# Altium PCB INNOVMED.PcbDoc
Units mm, origin at the board's own origin, x right, y up, seen from the top; angles counter-clockwise.
Board outline 37.59 x 63.88 mm, 2 copper layers (Top Layer, Bottom Layer); 25 components, 27 nets, 106 pads, 15 vias.
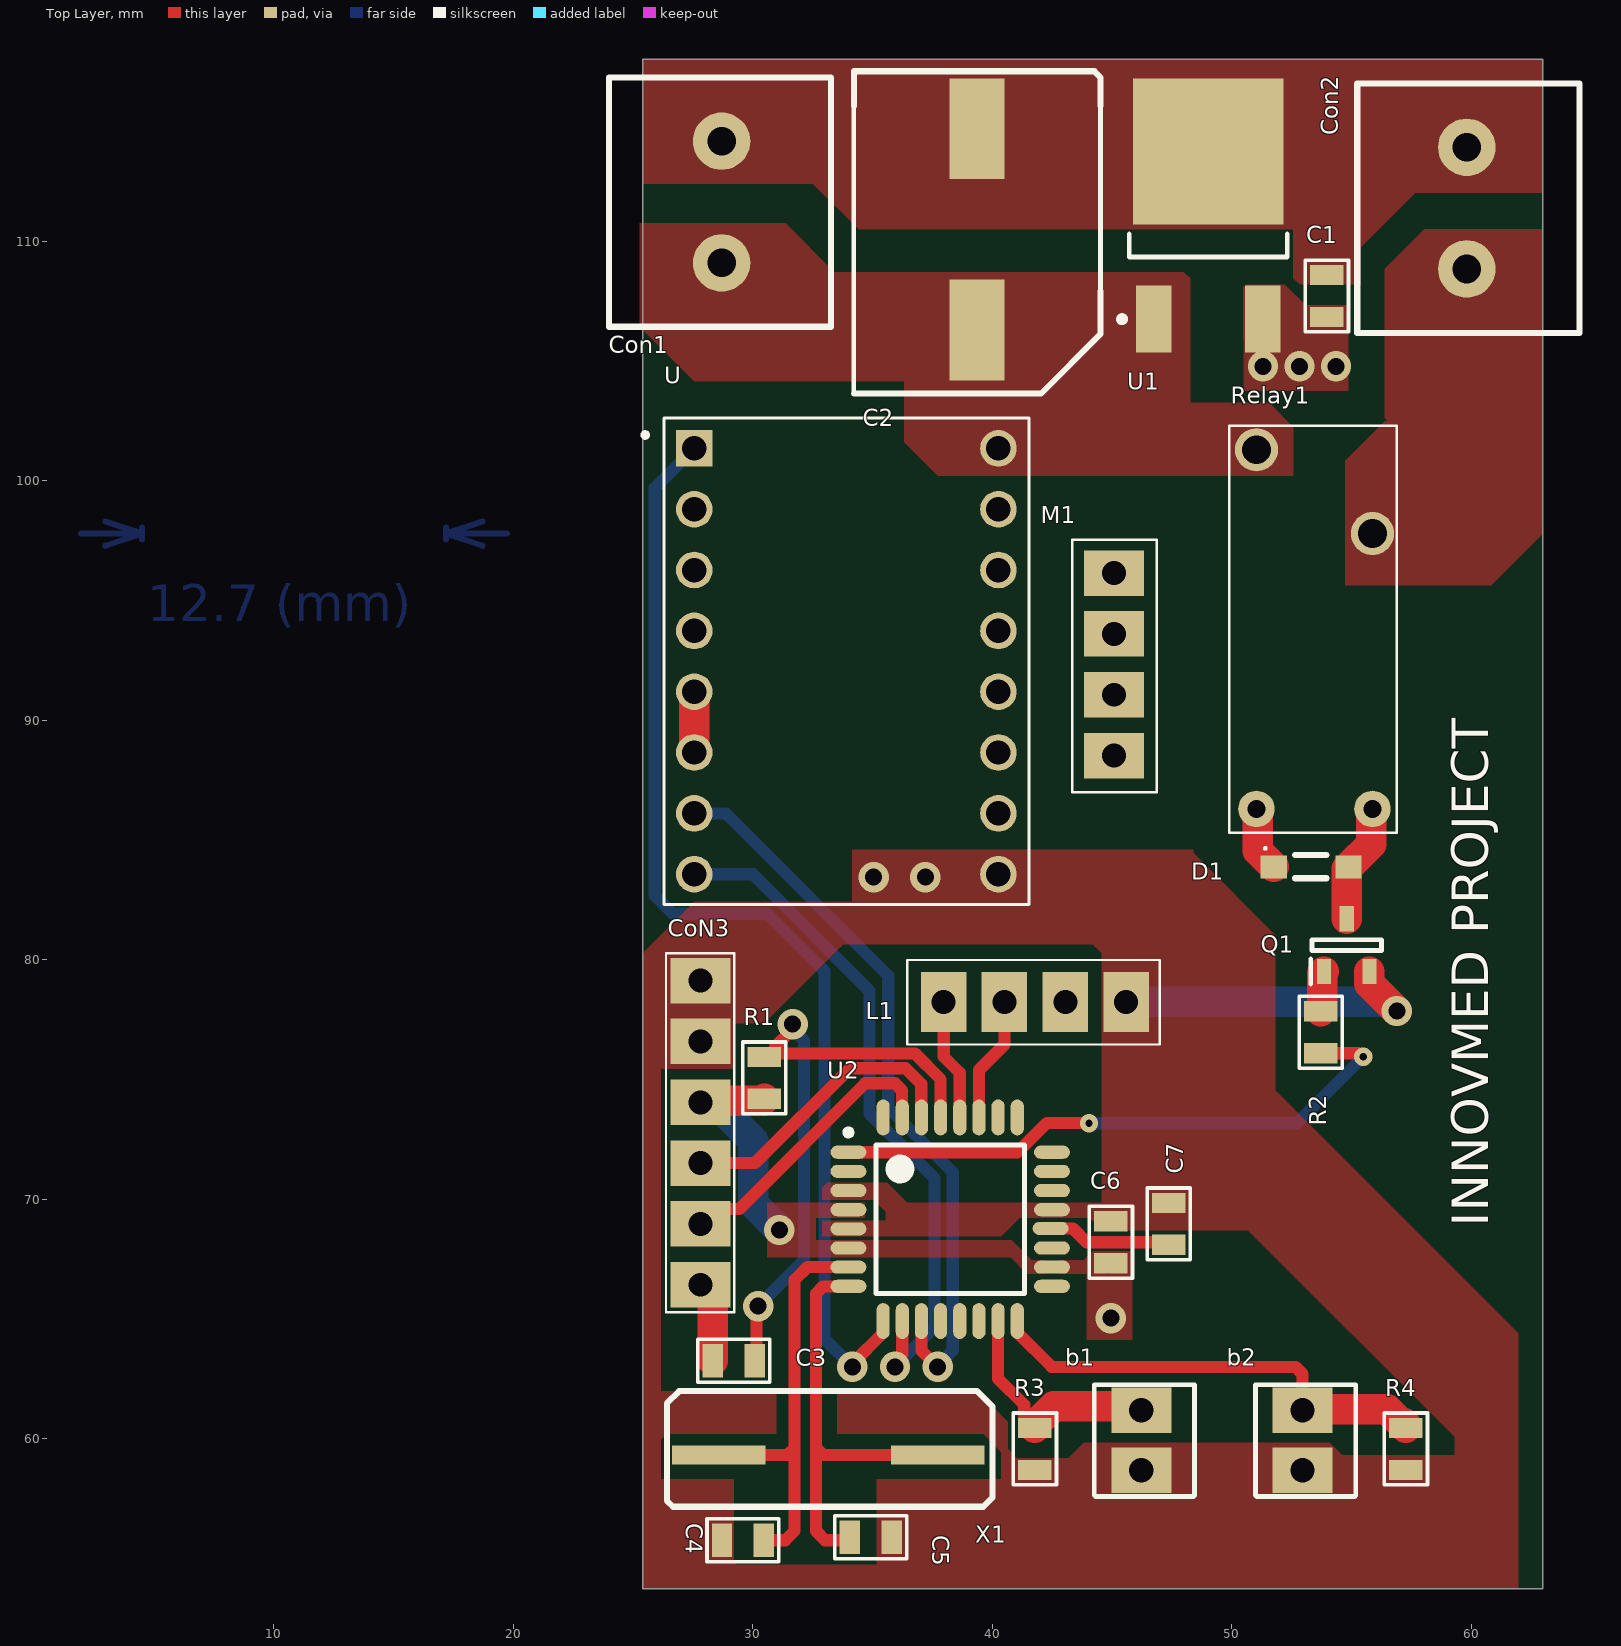
[diagram p0: Top Layer view]
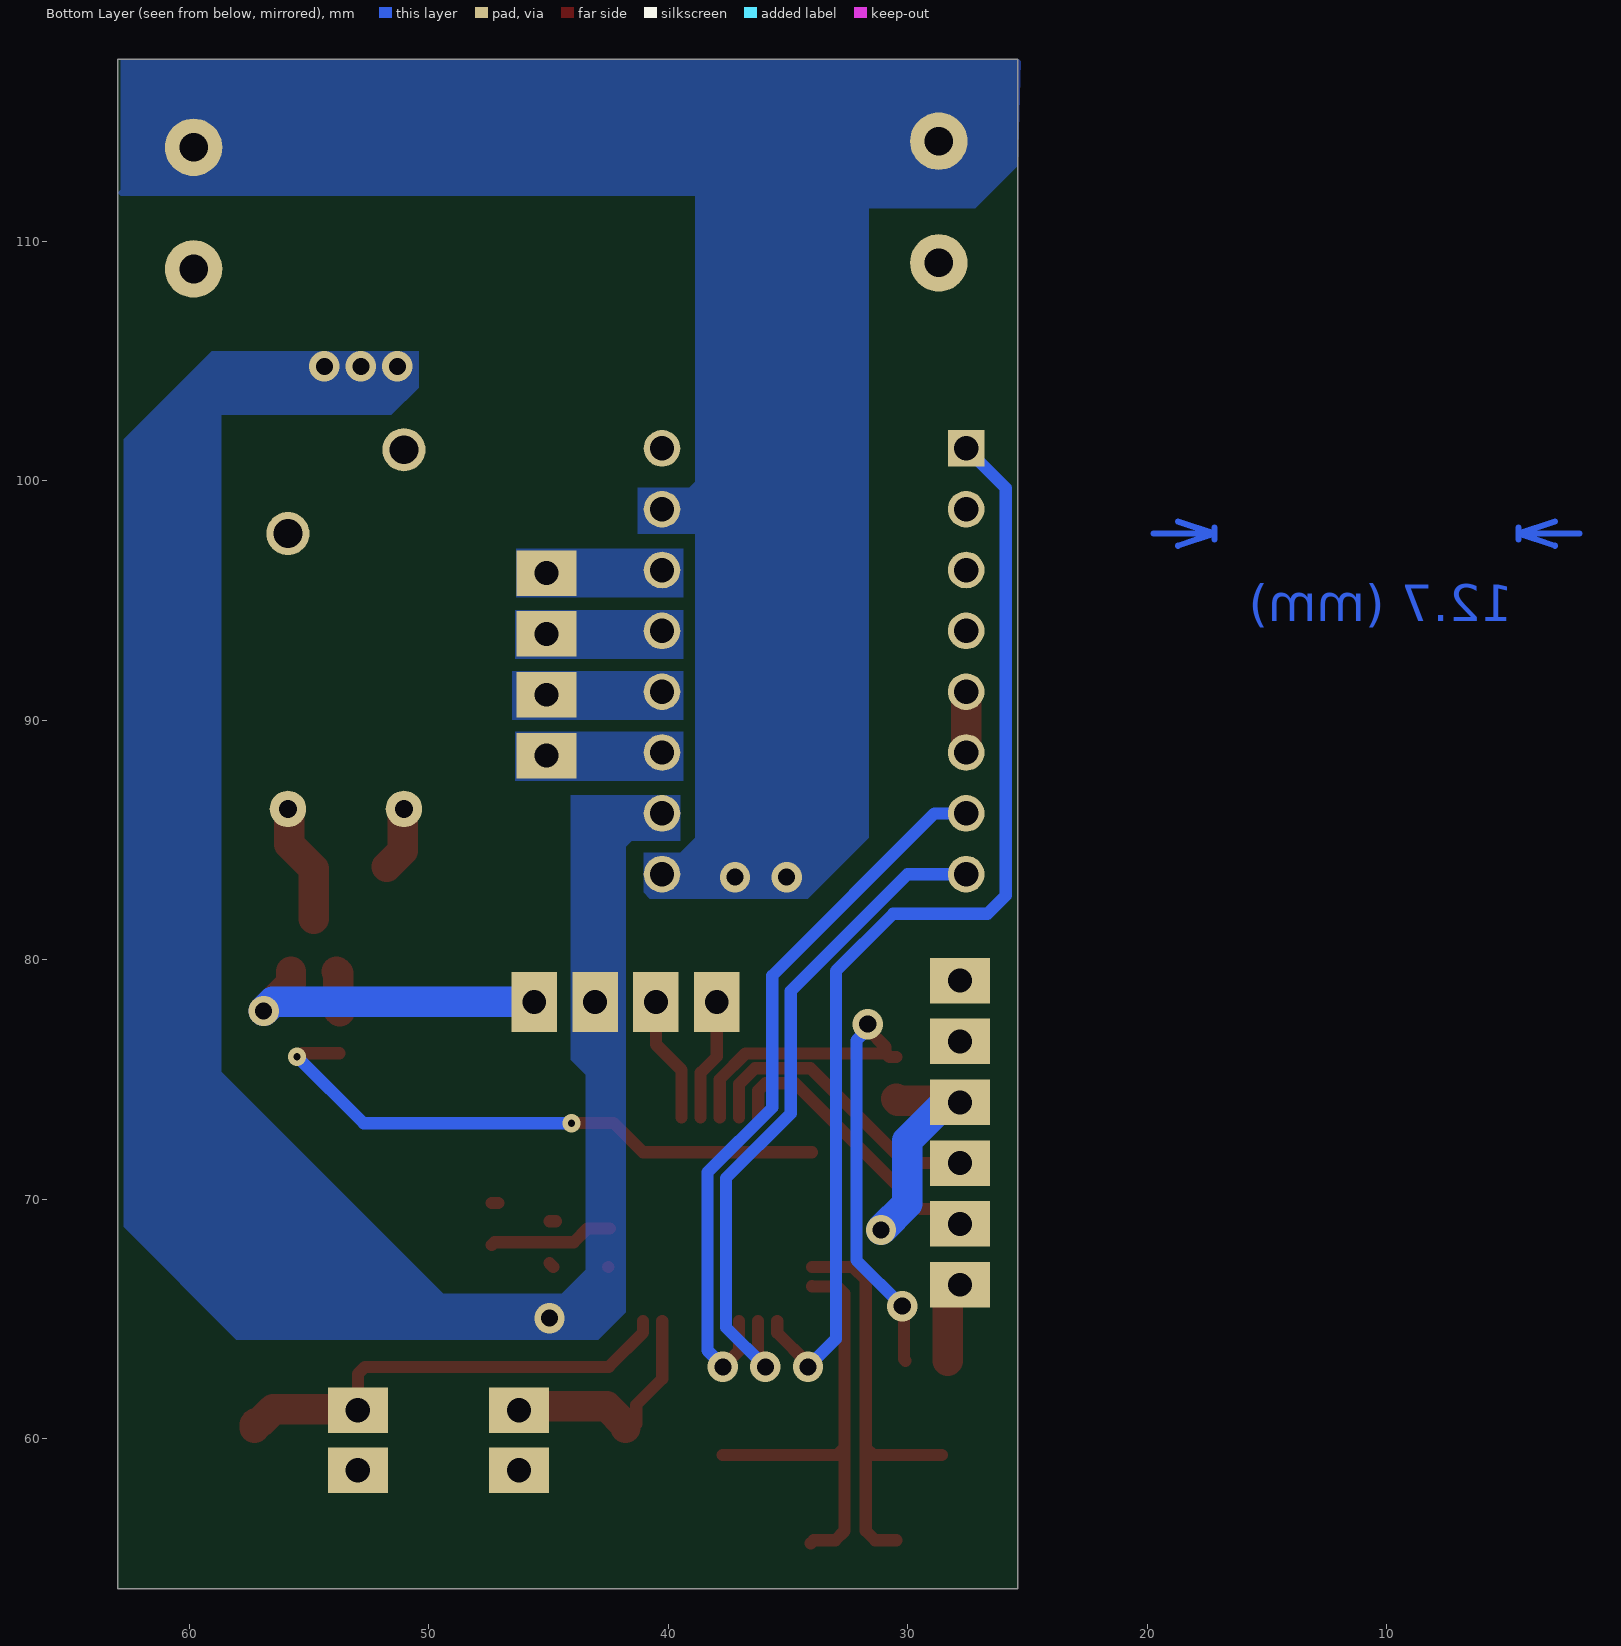
[diagram p1: Bottom Layer view, seen from below]
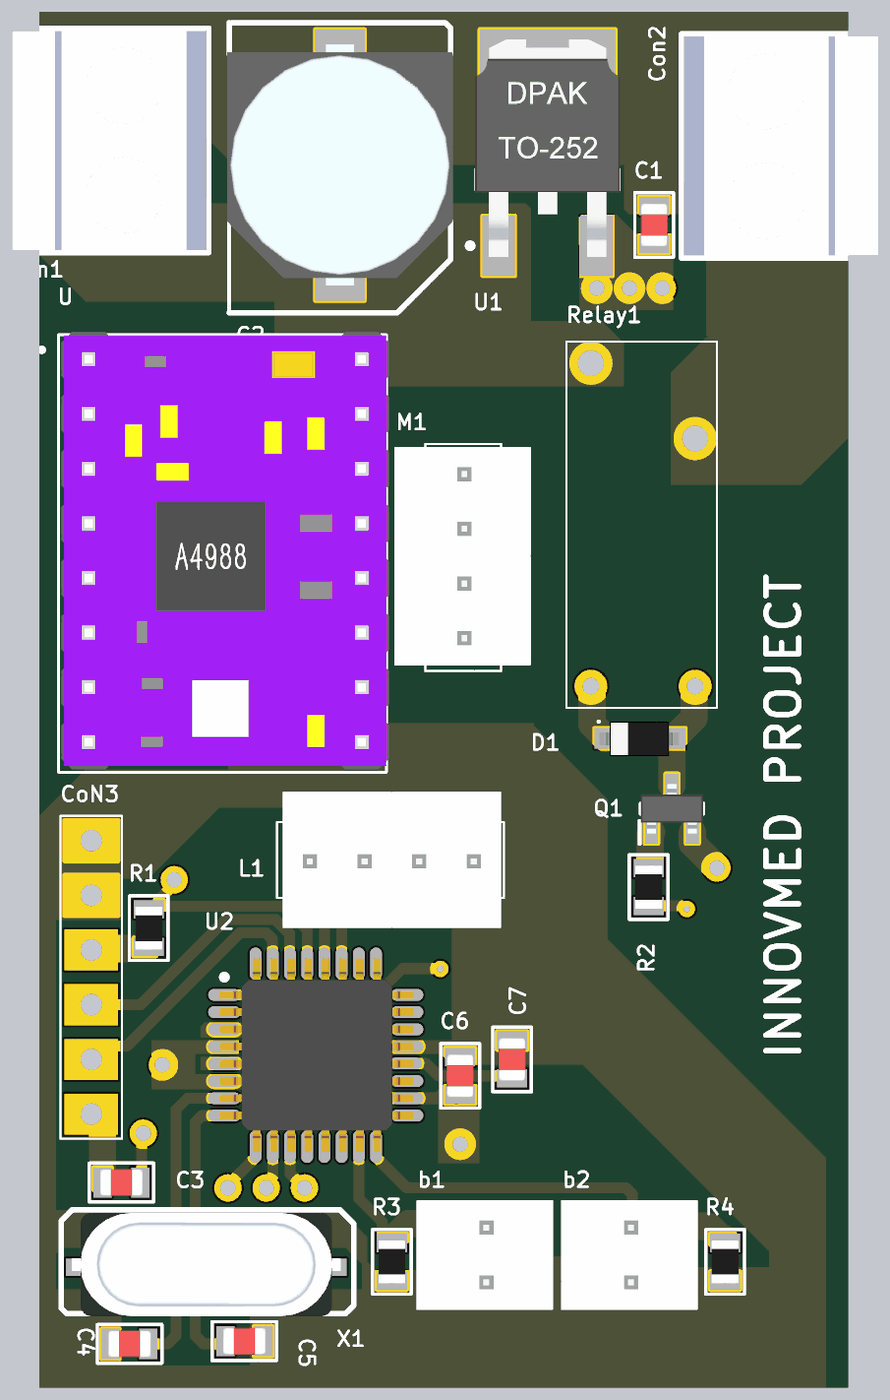
[diagram p2: 3D render of the assembled board from above, using the file's embedded part models]

## Layer stack, top to bottom
Top Solder: solder mask 0.0102, Solder Resist, Dk 3.5
Top Layer: signal copper 0.0356
Dielectric 1: dielectric 0.32, FR-4, Dk 4.8
Bottom Layer: signal copper 0.0356
Bottom Solder: solder mask 0.0102, Solder Resist, Dk 3.5

## Board outline
25.4,53.721 25.4,117.602 62.992,117.602 62.992,53.721

## Design rules (kind name [scope] priority, off if disabled: settings)
Clearance [All] p1: gap=0.025 ignorepadtopadclearanceinfootprint=FALSE
PolygonConnect [All] p1: connectstyle=Direct reliefconductorwidth=0.254 reliefentries=4 polygonreliefangle="90 Angle" airgapwidth=0.254
RoutingVias [All] p1: holewidth=0.711 width=1.27 viastyle="Through Hole" minholewidth=0.711 minwidth=1.27 maxholewidth=0.711 maxwidth=1.27
SolderMaskExpansion [All] p1: expansion=0.102 istentingtop=FALSE
Width [All] p1: maxlimit=254 minlimit=0.254 preferedwidth=0.254 bottomlayer_maxwidth=25.4 minimp=50.000000 maximp=50.000000 favimp=50.000000
30 further rules are at their usual default settings.

## Components (designator, comment, footprint, x,y, rotation, side; value= is the part's Value field where it differs from the comment)
b1 "PushButton" 2pinCon 46.228,61.149 r0 top
b2 "PushButton" 2pinCon 52.959,61.149 r0 top
C1 "100nF 0805" C-0805R 53.975,107.71 r90 top
C2 "25v 330uf" "10*10 capacitor" 39.37,110.49 r90 top
C3 "100nF 0805" C-0805R 29.21,63.246 r0 top
C4 "22pF 0805" C-0805R 29.591,55.753 r180 top
C5 "22pF 0805" C-0805R 34.925,55.88 r0 top
C6 "100nF 0805" C-0805R 44.958,68.199 r90 top
C7 "100nF 0805" C-0805R 47.371,68.961 r90 top
Con1 "2pin" Contactor 28.702,114.173 r270 top
Con2 "2pin" Contactor 59.817,108.839 r90 top
CoN3 "5pinCon_" 5pinCon 27.813,66.421 r0 top
D1 "MMSZ22V-HT" SOD123 51.816,83.82 r0 top
L1 "16*2 lcd" 4pinCon 41.783,78.232 r270 top
M1 "MotorConnection" 4pinCon 45.085,92.329 r0 top
Q1 "BC817-40,235" SOT95P230X110-3N 54.803,80.602 r90 top
R1 "10K" R-0805R 30.48,75.057 r270 top
R2 "1K" R-0805R 53.721,76.962 r90 top
R3 "10K" R-0805R 41.783,59.563 r90 top
R4 "10K" R-0805R 57.277,59.563 r90 top
Relay1 "relay" Relay 56.896,85.29 r90 top
U "A4988_STEPPER_MOTOR_DRIVER_CARRIER" MODULE_A4988_STEPPER_MOTOR_DRIVER_CARRIER 33.909,92.456 r0 top
U1 "L78M05CDT" TO-252 49.022,110.744 r90 top
U2 "ATMEGA328P-AU" TQFP80P900X900X120-32N 38.246,69.156 r0 top
X1 "Crystal" crystal 28.575,59.309 r0 top

## Footprints (in the part's own frame and the unit in brackets; to place one, negate y for a bottom-side part, rotate by r counter-clockwise, add the part's x,y. Pads: shape width x height; smd on the part's side, far side on the other; paste and mask are expansions set on the pad)
2pinCon [mm]
  rect 2.5x1.9 hole 1.016: 1(0,0.025) 2(0,-2.475)
  silkscreen extent -1.96,-3.57 2.22,1.1, body extent -3.3,-3.81 3.05,1.27, height 10.68
4pinCon [mm]
  rect 2.5x1.9 hole 1: 1(0,-3.81) 2(0,-1.27) 3(0,1.27) 4(0,3.81)
  silkscreen extent -1.75,-5.33 1.78,5.21, body extent -3.18,-5.08 3.18,5.08, height 10.68
5pinCon [mm]
  rect 2.5x1.9 hole 1: 1(0,0) 2(0,2.54) 3(0,5.08) 4(0,7.62) 5(0,10.16) 6(0,12.7)
  silkscreen extent -1.44,-1.14 1.42,13.84
"10*10 capacitor" [mm]
  rect 4.2x2.3 smd: 1(-4.2,0) 2(4.2,0)
  silkscreen extent -6.86,-5.15 6.6,5.15, body extent -5.6,-5.25 5.6,5.25, height 10.5
C-0805R [mm] "capacitor 0805 reflow soldering"
  rect 0.85x1.4 smd: 1(-0.875,0) 2(0.875,0)
  silkscreen extent -1.5,-0.9 1.5,0.9, body extent -1,-0.63 1,0.63, height 0.78
Contactor [mm]
  round 2.4 hole 1.2: 1(0,0) 2(5.08,0)
  silkscreen extent -2.67,-4.7 7.75,4.57, body extent -2.54,-4.57 7.62,4.43, height 15.21
crystal [mm]
  rect 3.9x0.8 smd: 1(0,0) 2(9.153,0)
  silkscreen extent -2.16,-2.16 11.43,2.67, body extent -1.67,-2.27 10.83,2.53, height 4.01
MODULE_A4988_STEPPER_MOTOR_DRIVER_CARRIER [mm]
  rect 1.53x1.53 hole 1.02: 1(-6.35,8.89)
  round 1.53 hole 1.02: 2(-6.35,6.35) 3(-6.35,3.81) 4(-6.35,1.27) 5(-6.35,-1.27) 6(-6.35,-3.81) 7(-6.35,-6.35) 8(-6.35,-8.89) 9(6.35,-8.89) 10(6.35,-6.35) 11(6.35,-3.81) 12(6.35,-1.27) 13(6.35,1.27) 14(6.35,3.81) 15(6.35,6.35) 16(6.35,8.89)
  silkscreen extent -8.5,-10.16 7.62,10.16, body extent -7.49,-10.03 7.75,10.29, height 5.09
R-0805R [mm] "resistor 0805 reflow soldering"
  rect 0.85x1.4 smd: 1(-0.875,0) 2(0.875,0)
  silkscreen extent -1.5,-0.9 1.5,0.9, body extent -1,-0.62 1,0.63, height 0.5
Relay [mm]
  round 1.524 hole 0.762: 1(1,5.86) 2(1,1.016)
  round 1.8 hole 1.2: 3(12.5,1.016) 4(16,5.86)
  silkscreen extent 0,0 17,7
SOD123 [mm]
  rect 1.1x0.95 smd: a(3.063,0.05) k(-0.062,0.05)
  silkscreen extent -0.46,-0.43 2.15,0.87, body extent -0.38,-0.78 3.32,0.83, height 1.28
SOT95P230X110-3N [mm]
  rect 1.05x0.6 smd: 1(-1.1,0.95) 2(-1.1,-0.95) 3(1.1,0)
  silkscreen extent -1.63,-1.45 0.23,1.5, body extent -1.15,-1.45 1.15,1.45, height 1.1
TO-252 [mm]
  rect 2.8x1.5 smd: 1(-4,2.275) 2(-4,-2.275)
  rect 6.1x6.3 smd: 3(3,0)
  silkscreen extent -4.12,-3.3 -0.45,3.72, body extent -4.52,-3.37 5.58,3.37, height 2.41
TQFP80P900X900X120-32N [mm] "TQFP, 32-Leads, Body 7.00x7.00mm, Pitch 0.80mm, IPC Medium Density"
  oval 1.5x0.55 smd: 1(-4.25,2.8) 2(-4.25,2) 3(-4.25,1.2) 4(-4.25,0.4) 5(-4.25,-0.4) 6(-4.25,-1.2) 7(-4.25,-2) 8(-4.25,-2.8) 17(4.25,-2.8) 18(4.25,-2) 19(4.25,-1.2) 20(4.191,-0.381) 21(4.25,0.4) 22(4.25,1.2) 23(4.25,2) 24(4.25,2.8)
  oval 0.55x1.5 smd: 9(-2.8,-4.25) 10(-2,-4.25) 11(-1.2,-4.25) 12(-0.4,-4.25) 13(0.4,-4.25) 14(1.2,-4.25) 15(2,-4.25) 16(2.8,-4.25) 25(2.8,4.25) 26(2,4.25) 27(1.2,4.25) 28(0.4,4.25) 29(-0.4,4.25) 30(-1.2,4.25) 31(-2,4.25) 32(-2.8,4.25)
  silkscreen extent -4.37,-3.1 3.1,3.75, body extent -4.44,-4.5 4.55,4.5, height 1.6

## Part data
C1 C3 C4 C5 C6 C7: Case/Package=Radial, Manufacturer=Nichicon, Manufacturer Part Number=LKS1J472MESZ, Max Operating Temperature=85°C, Min Operating Temperature=-40°C, Package Quantity=250, Ripple Current=3A, Supplier Part Number 1=647-LKS1J472MESZ, Tolerance=20%, Voltage Rating=63V, Diameter=22mm, Height - Seated (Max)=1.772inch, Lead Pitch=0.394inch, Length=45mm, Life (Hours)=1000Hour, Mount="Through Hole", Packaging=Bulk, RoHS=Yes, Supplier 1=Mouser, Termination="Snap in", Voltage Rating (DC)=63V
  C1 C3 C6 C7: ComponentLink2Description=Link, ComponentLink2URL=https://ozdisan.com/Product/Detail/342152/CL21F104ZBANNNC
  C4 C5: ComponentLink1Description=Link, ComponentLink1URL=https://ozdisan.com/passive-components/capacitors/smt-smd-and-mlcc-capacitors/CL21C220JCANNNC
Q1: "Transistor BJT NPN", Manufacturer_Name=Nexperia, Mouser Part Number=771-BC817-40235, RS Part Number=1707957, Datasheet Link=http://assets.nexperia.com/documents/data-sheet/BC817_BC817W_BC337.pdf, Height=1.1mm, Manufacturer_Part_Number=BC817-40,235, Mouser Price/Stock=https://www.mouser.com/Search/Refine.aspx?Keyword=771-BC817-40235, RS Price/Stock=http://uk.rs-online.com/web/p/products/1707957
R1 R3 R4: library part "10K 0805"
R2: library part "1K 0805"
U: "Stepper Motor Driver", Package=None, Availability=Unavailable, MF=Pololu, MP="A4988 STEPPER MOTOR DRIVER CARRIER", Price=None, SnapEDA_Link=https://www.snapeda.com/parts/A4988%20STEPPER%20MOTOR%20DRIVER%20CARRIER/Pololu/view-part/1499394/?ref=snap
U1: library part L78M05, Case/Package=DPAK, Dropout Voltage=2V, Manufacturer=STMicroelectronics, Manufacturer Part Number=L78M15CDT, Max Input Voltage=35V, Max Operating Temperature=150°C, Max Output Current=500mA, Min Operating Temperature=0°C, Output Voltage=15V, Package Quantity=75, Quiescent Current=6mA, ComponentLink1Description=Link, ComponentLink1URL=https://ozdisan.com/integrated-circuits-ics/power-management-ics/linear-voltage-regulators/MC7805BDTRKG, Height=2.4mm, Length=6.6mm, Min Input Voltage=35V, Mount="Surface Mount", Number of Outputs=1, Number of Pins=3, Output Current=500mA, Output Type=Fixed, Packaging=Rail/Tube, Polarity=Positive, Radiation Hardening=No, RoHS=Yes, Supplier 1=Avnet, Supplier Part Number 1=L78M15CDT, Width=6.2mm
U2: "Microchip Technology ATMEGA328P-AN, 8bit AVR Microcontroller, 20MHz, 32 kB Flash, 32-Pin TQFP"
X1: "AS49SD-16M-FC160F3-TR"
C2: ComponentLink1Description=Link, ComponentLink1URL=https://ozdisan.com/passive-components/capacitors/aluminum-capacitors/BXJ25VC330MJ10TP
D1: ComponentLink1Description=Link, ComponentLink1URL=https://ozdisan.com/power-semiconductors/diodes-diode-modules-and-rectifiers/zener-diodes/MMSZ22V-HT

## Via types
v1: diameter 1.27, hole 0.711, Top Layer to Bottom Layer, 13 vias
v2: diameter 0.762, hole 0.305, Top Layer to Bottom Layer, 2 vias

## Nets (pads, with @x,y where several pads share a name; then routed paths per layer and width w, separated by ;. In a path a pad name is that pad's centre, name@x,y a point inside that pad or via, vN(x,y) a via of type N, cw(c..) or ccw(c..) an arc to the next point about the centre after c; other vN are vias at no path point)
5v: C1.1 C6.1 CoN3.4 L1.3 R1.2 U1.2 U2.4 U2.6 U2.18 U.10 | length 10
  Top Layer w0.508: U2.18 U2.18@42.504,67.164 ; C6.1@44.798,67.164 C6.1
  Top Layer w1.27: CoN3.4 27.884,74.112 30.415,74.112 30.48,74.177 R1.2
  Bottom Layer w1.27: CoN3.4 28.128,73.726 28.722,73.726 30.019,72.429 30.019,69.803 v1(31.115,68.707)
  other v1: 44.958,65.024 51.308,104.775 52.832,104.775 54.356,104.775
12v: C2.1 Con1.2 Relay1.4 U1.1 U.16
DIR: U2.10 U.8 | length 28.9
  Top Layer w0.508: v1(35.941,62.992) 35.941,63.198 36.246,63.503 U2.10
  Bottom Layer w0.508: U.8 30.006,83.566 34.881,78.691 34.881,73.577 37.592,70.866 37.592,64.643 v1(35.941,62.992)
EN: U2.9 U.1 | length 47.2
  Top Layer w0.508: v1(34.163,62.992) 34.163,63.137 35.446,64.42 U2.9
  Bottom Layer w0.508: U.1 25.908,99.695 25.908,82.677 26.67,81.915 30.607,81.915 32.999,79.523 32.999,64.156 v1(34.163,62.992)
GND: b1.2 b2.2 C1.2 C2.2 C4.2 C5.2 C6.2 C7.2 Con1.1 Con2.2 CoN3.5 CoN3.6 L1.4 Q1.2 R3.1 R4.1 U1.3 U2.3 U2.5 U2.21 U.9 U.15 | length 14.4
  Top Layer w0.508: C6.2@44.683,69.074 C6.2 ; L1.4@45.593,77.932 L1.4 ; C7.2@47.096,69.836 C7.2
  Top Layer w1.27: Q1.2 55.753,78.994 v1(56.896,77.851)
  Bottom Layer w1.27: L1.4 56.515,78.232 v1(56.896,77.851)
  other v1: 35.052,83.439 37.211,83.439
NetC3_2: C3.2 R1.1 U2.29 | length 26.1
  Top Layer w0.508: C3.2 30.155,63.317 30.155,65.461 v1(30.226,65.532) ; R1.1 30.755,75.932 R1.1@30.896,76.073 ; v1(31.667,77.302) 31.667,77.096 30.926,76.354 30.926,76.103 R1.1@30.896,76.073 ; U2.29 37.846,74.998 36.771,76.073 R1.1@30.896,76.073
  Bottom Layer w0.508: v1(30.226,65.532) 32.143,67.449 32.143,76.623 31.667,77.099 v1(31.667,77.302)
NetC4_1: C4.1 U2.7 X1.1 | length 17.7
  Top Layer w0.508: X1.1 31.452,59.309 31.75,59.607 ; C4.1 31.358,55.753 31.75,56.145 31.75,59.607 ; U2.7 33.988,67.164 32.283,67.164 31.75,66.631 31.75,59.607
NetC5_1: C5.1 U2.8 X1.2 | length 18.2
  Top Layer w0.508: U2.8 33.988,66.348 32.937,66.348 32.639,66.05 32.639,59.607 ; C5.1@34.05,55.626 33.923,55.753 33.02,55.753 32.639,56.134 32.639,59.607 ; X1.2 32.937,59.309 32.639,59.607
NetC7_1: C7.1 U2.20 | length 5.2
  Top Layer w0.508: U2.20 42.445,68.767 43.374,68.767 43.942,68.199 47.258,68.199 C7.1
NetCon2_1: Con2.1 Relay1.3
NetD1_a: D1.a Q1.3 Relay1.2 | length 5
  Top Layer w1.27: Q1.3 54.803,83.794 D1.a 55.831,84.823 55.831,86.241 Relay1.2
NetD1_k: D1.k Relay1.1 | length 2.7
  Top Layer w1.27: Relay1.1 51.085,86.241 51.085,84.539 D1.k
NetM1_1: M1.1 U.11
NetM1_2: M1.2 U.12
NetM1_3: M1.3 U.13
NetM1_4: M1.4 U.14
NetQ1_1: Q1.1 R2.2 | length 1.7
  Top Layer w1.27: R2.2 53.786,77.902 53.786,79.435 Q1.1
NetU_5: U.5 U.6 | length 2.5
  Top Layer w1.27: U.6 U.5
Re: R2.1 U2.1 | length 25
  Top Layer w0.508: U2.1 41.057,71.956 42.283,73.182 44.02,73.182 v2(44.039,73.163) ; R2.1 55.289,76.087 55.43,75.946 v2(55.499,75.946)
  Bottom Layer w0.508: v2(44.039,73.163) 52.716,73.163 v2(55.499,75.946)
RS: C3.1 CoN3.1 | length 2.3
  Top Layer w1.27: CoN3.1@28.321,65.532 28.328,65.525 28.328,63.253 C3.1
RX: CoN3.3 U2.30 | length 12.5
  Top Layer w0.508: CoN3.3 30.099,71.501 34.059,75.461 36.378,75.461 37.038,74.8 37.038,73.414 U2.30
SCL: L1.1 U2.28 | length 5.1
  Top Layer w0.508: L1.1 37.973,75.946 38.646,75.273 U2.28
SDA: L1.2 U2.27 | length 5.3
  Top Layer w0.508: U2.27 39.446,75.387 40.513,76.454 L1.2
STEP: U2.11 U.7 | length 30.8
  Top Layer w0.508: U2.11 37.046,63.665 v1(37.719,62.992)
  Bottom Layer w0.508: U.7 28.877,86.106 35.658,79.325 35.658,73.816 38.354,71.12 38.354,63.671 37.719,63.036 v1(37.719,62.992)
SW1: b1.1 R3.2 U2.15 | length 10.2
  Top Layer w0.508: U2.15 40.246,62.497 41.337,61.406 41.337,60.609 41.508,60.438 R3.2
  Top Layer w1.27: R3.2 41.783,60.559 42.565,61.341 46.061,61.341 b1.1
SW2: b2.1 R4.2 U2.16 | length 19.4
  Top Layer w0.508: U2.16 41.046,64.431 42.485,62.992 52.661,62.992 52.959,62.694 b2.1
  Top Layer w1.27: b2.1 52.999,61.214 56.501,61.214 57.067,60.648 57.212,60.648 57.277,60.583 R4.2
TX: CoN3.2 U2.31 | length 12.1
  Top Layer w0.508: CoN3.2 28.436,69.584 29.452,69.584 34.702,74.834 35.94,74.834 36.238,74.536 36.238,73.414 U2.31
pads on no net: U2.2 U2.12 U2.13 U2.14 U2.17 U2.19 U2.22 U2.23 U2.24 U2.25 U2.26 U2.32 U.2 U.3 U.4
copper on no net: | length 12.5
  Bottom Layer w0.254: 1.954,97.789 4.494,97.789 ; 2.97,97.281 4.494,97.789 ; 2.97,98.297 4.494,97.789 ; 4.494,97.535 4.494,98.043 ; 17.194,97.535 17.194,98.043 ; 18.718,97.281 17.194,97.789 ; 18.718,98.297 17.194,97.789 ; 19.734,97.789 17.194,97.789

## Polygon pours and split planes (outlines as drawn)
5v on Top Layer "5V_L01_P010" (solid, pour order 10): 43.942,66.888 43.942,64.135 45.847,64.135 45.847,66.888 45.847,67.818 44.196,67.818 43.815,67.437 41.656,67.437 40.824,68.269 32.639,68.269 32.639,69.215 34.671,69.215 34.671,69.85 30.607,69.85 30.607,67.564 40.767,67.564 41.443,66.888
GND on Top Layer "GND_L01_P009" (solid, pour order 9): 60.071,59.309 60.325,59.055 60.325,53.721 58.547,53.721 58.42,53.848 58.42,59.309
GND on Top Layer "GND_L01_P007" (solid, pour order 7): 41.021,59.182 40.64,59.563 40.64,60.706 39.37,61.976 39.243,61.849 33.528,61.849 33.528,60.198 39.624,60.198 40.386,59.436 40.386,58.293 35.179,58.293 35.179,54.737 29.337,54.737 29.21,54.864 29.21,58.293 26.162,58.293 26.162,59.944 26.416,60.198 30.988,60.198 30.988,61.976 26.162,61.976 26.162,75.438 29.21,75.438 29.21,77.343 30.48,77.343 33.782,80.645 44.196,80.645 44.577,80.264 44.577,69.85 36.449,69.85 35.618,70.681 33.089,70.681 32.893,70.485 32.893,69.977 35.052,69.977 35.56,69.469 35.56,69.088 32.893,69.088 32.893,68.453 40.386,68.453 41.148,69.215 44.069,69.215 44.577,68.707 50.673,68.707 59.309,60.071 59.309,53.721 61.976,53.721 61.976,64.389 51.816,74.549 51.816,81.026 48.387,84.455 48.387,84.582 34.163,84.582 34.163,82.423 27.559,82.423 25.4,80.264 25.4,53.721 58.801,53.721 58.801,59.309 54.61,59.309 54.102,59.817 43.815,59.817 43.18,59.182
5v on Top Layer "5V_L01_P008" (solid, pour order 8): 50.476,108.137 50.519,108.181 52.22,108.181 53.086,107.315 54.864,107.315 54.864,103.759 50.497,103.759
NetCon2_1 on Top Layer "NETCON2_1_L01_P002" (solid, pour order 2): 56.515,102.489 56.388,102.616 56.388,108.839 58.039,110.49 62.992,110.49 62.992,97.79 60.833,95.631 54.737,95.631 54.737,100.838 56.388,102.489
12v on Top Layer "12V_L01_P001" (solid, pour order 1): 33.401,108.712 31.369,110.744 25.273,110.744 25.273,106.426 27.559,104.14 36.322,104.14 36.322,101.6 37.719,100.203 44.831,100.203 52.578,100.203 52.578,102.235 51.562,103.251 48.26,103.251 48.26,108.458 48.006,108.712
GND on Top Layer "GND_L01_P000" (solid, pour order 0): 25.4,117.602 62.992,117.602 62.992,112.014 57.658,112.014 55.372,109.728 55.372,108.204 52.832,108.204 52.578,108.458 52.578,110.49 34.417,110.49 32.512,112.395 25.4,112.395
GND on Bottom Layer "GND_L02_P012" (solid, pour order 12): 25.273,117.602 62.865,117.602 62.865,112.141 62.992,112.014 62.865,111.887 38.862,111.887 38.862,99.949 39.116,99.695 41.275,99.695 41.275,97.79 38.862,97.79 38.862,85.09 39.497,84.455 41.021,84.455 41.021,82.804 40.767,82.55 34.163,82.55 31.623,85.09 31.623,106.172 31.623,111.379 27.178,111.379 25.4,113.157
5v on Bottom Layer "5V_L02_P011" (solid, pour order 11): 49.403,66.04 58.674,75.311 58.674,102.743 51.562,102.743 50.419,103.886 50.419,105.41 59.055,105.41 62.738,101.727 62.738,68.834 58.039,64.135 42.926,64.135 41.783,65.278 41.783,84.709 41.529,84.963 39.497,84.963 39.497,86.868 44.069,86.868 44.069,75.819 43.434,75.184 43.434,67.056 44.45,66.04
NetM1_1 on Bottom Layer "NETM1_1_L02_P006" (solid, pour order 6): 39.37,89.505 46.386,89.505 46.386,87.473 39.37,87.473
NetM1_2 on Bottom Layer "NETM1_2_L02_P005" (solid, pour order 5): 39.37,92.045 46.513,92.045 46.513,90.013 39.37,90.013
NetM1_3 on Bottom Layer "NETM1_3_L02_P004" (solid, pour order 4): 39.37,94.585 46.386,94.585 46.386,92.553 39.37,92.553
NetM1_4 on Bottom Layer "NETM1_4_L02_P003" (solid, pour order 3): 39.37,97.155 46.355,97.155 46.355,95.123 39.37,95.123

## Other copper
Bottom Layer:
  text "12.7 (mm)" at 4.724,94.132 h1.52

## Silkscreen, mask and mechanical layers (free items; w line width, h text height)
Top Overlay:
  text "INNOVMED PROJECT" at 60.706,68.834 h1.52 r90
Mechanical 1:
  the board outline again, w0.254